# EAGLE board ProjetoU2 (EAGLE 9.7.0)

Size 239.29 x 81.54 mm. Coordinates in mm from the lower left corner, seen from the top.
Outline: 0,0 239.29,0 239.29,81.54 0,81.54 0,0
Copper layers (1*16): Top 0.035mm / dielectric 1.5mm / Bottom 0.035mm
Design rules "default": minimum track width 6mil, minimum drill 0.35mm, track to track 6mil, track to pad 6mil, pad to pad 6mil, via to via 6mil, smd to smd 6mil, copper to edge 40mil, drill to drill 6mil, minimum pad ring 10mil, minimum via ring 8mil, stop-mask expansion 4mil, vias tented up to drill 0mil, thermal gap 10mil

## Footprints (pad centres in the part's own frame; a part is rotated, then mirrored left to right if it is on the bottom)
LEDRD254W60D565H860B_W = drill 0.981 pad 1.581: 1 -1.27,0; 2 1.27,0
LEDRD254W60D565H860B = drill 0.981 pad 1.581: 1 -1.27,0; 2 1.27,0
LEDRD254W60D565H860B_Y = drill 0.981 pad 1.581: 1 -1.27,0; 2 1.27,0
LEDRD254W60D565H860B_O = drill 0.981 pad 1.581: 1 -1.27,0; 2 1.27,0
RESAD1016W63L850D250B = drill 0.83 pad 1.43: 1 -5.08,0; 2 5.08,0
HA-06-SM065 = drill 1 pad 1.676: 1 -2.54,-2.54; 2 0,2.54; 3 2.54,-2.54
SWITCH-MOMENTARY-PTH-6.5MM = drill 1.016 pad 1.88: 1 -3.251,2.261; 2 3.251,2.261; 3 -3.251,-2.261; 4 3.251,-2.261
SG90 = drill 1.016 long: 1 -2.54,0; 2 0,0; 3 2.54,0
ARDUINO-UNO-R3-SHIELD = drill 1.016 pad 1.88: 3.3V 24.13,-2.54; 5V 24.13,0; A0 24.13,12.7; A1 24.13,15.24; A2 24.13,17.78; A3 24.13,20.32; A4 24.13,22.86; A5 24.13,25.4; AREF -24.13,-13.97; D2 -24.13,20.32; D3 -24.13,17.78; D4 -24.13,15.24; D5 -24.13,12.7; D6 -24.13,10.16; D7 -24.13,7.62; D8 -24.13,3.81; D9 -24.13,1.27; D10 -24.13,-1.27; D11 -24.13,-3.81; D12 -24.13,-6.35; D13 -24.13,-8.89; GND@0 24.13,2.54; GND@1 24.13,5.08; GND@2 -24.13,-11.43; IOREF 24.13,-7.62; NC 24.13,-10.16; RES 24.13,-5.08; RX -24.13,25.4; SCL -24.13,-19.05; SDA -24.13,-16.51; TX -24.13,22.86; VIN 24.13,7.62

## Placement (x,y rotation side)
DFARÓIS  WHITE  [LEDRD254W60D565H860B_W]  206.29,39.07 180 top
DIE  RED  [LEDRD254W60D565H860B]  216.45,39.07 180 top
DPD  YELLOW  [LEDRD254W60D565H860B_Y]  231.69,39.07 180 top
DPE  ORANGE  [LEDRD254W60D565H860B_O]  224.07,39.07 180 top
R1  10k  [RESAD1016W63L850D250B]  93.26,13.67 90 top
R2  10k  [RESAD1016W63L850D250B]  103.42,13.67 90 top
R3  10k  [RESAD1016W63L850D250B]  113.58,13.67 90 top
R4  10k  [RESAD1016W63L850D250B]  123.74,13.67 90 top
R5  220  [RESAD1016W63L850D250B]  207.56,28.91 90 top
R6  220  [RESAD1016W63L850D250B]  217.72,28.91 90 top
R7  220  [RESAD1016W63L850D250B]  225.34,28.91 90 top
R8  220  [RESAD1016W63L850D250B]  232.96,28.91 90 top
R9  10k  [RESAD1016W63L850D250B]  166.92,44.15 0 top
R10  10k  [RESAD1016W63L850D250B]  177.08,41.61 0 top
R11  10k  [RESAD1016W63L850D250B]  187.24,39.07 0 top
RPOT2  400k  [HA-06-SM065]  154.22,26.37 0 top
RPOT3  250k  [HA-06-SM065]  141.52,26.37 0 top
S1  SWITCH_MOMENTARY  [SWITCH-MOMENTARY-PTH-6.5MM]  95.8,30.18 90 top
S2  SWITCH_MOMENTARY  [SWITCH-MOMENTARY-PTH-6.5MM]  105.96,30.18 90 top
S3  SWITCH_MOMENTARY  [SWITCH-MOMENTARY-PTH-6.5MM]  116.12,30.18 90 top
S4  SWITCH_MOMENTARY  [SWITCH-MOMENTARY-PTH-6.5MM]  126.28,30.18 90 top
SERVO1  SERVOSG90  [SG90]  192.47,74.56 180 top
U1  ARDUINO-UNO-R3-SHIELD  [ARDUINO-UNO-R3-SHIELD]  47.88,29.84 270 top

## Library data of the parts
DFARÓIS = Tinkercad; CATEGORY: Opto-Electronic; SUB-CATEGORY: LED; VALUE: LED_WHITE
DIE = Tinkercad; CATEGORY: Opto-Electronic; SUB-CATEGORY: LED; VALUE: LED_RED
DPD = Tinkercad; CATEGORY: Opto-Electronic; SUB-CATEGORY: LED; VALUE: LED_YELLOW
DPE = Tinkercad; CATEGORY: Opto-Electronic; SUB-CATEGORY: LED; VALUE: LED_ORANGE
R1-R11 RPOT2 RPOT3 S1-S4 SERVO1 U1 = Tinkercad

## Nets
DFARÓIS_A: DFARÓIS.1 R5.2
DIE_A: DIE.1 R6.2
DPD_A: DPD.1 R8.2
DPE_A: DPE.1 R7.2
R10_2: R10.2 R11.1
U1_5V: R9.1 RPOT2.1 RPOT3.1 S1.3 S1.4 S2.3 S2.4 S3.3 S3.4 S4.3 S4.4 SERVO1.2 U1.5V
U1_A0: R9.2 R10.1 U1.A0
U1_A1: RPOT2.2 U1.A1
U1_A2: RPOT3.2 U1.A2
U1_D4: R8.1 U1.D4
U1_D5: R7.1 U1.D5
U1_D6: R6.1 U1.D6
U1_D7: R5.1 U1.D7
U1_D9: SERVO1.3 U1.D9
U1_D10: R1.2 S1.1 S1.2 U1.D10
U1_D11: R2.2 S2.1 S2.2 U1.D11
U1_D12: R3.2 S3.1 S3.2 U1.D12
U1_D13: R4.2 S4.1 S4.2 U1.D13
U1_GND: DFARÓIS.2 DIE.2 DPD.2 DPE.2 R1.1 R2.1 R3.1 R4.1 R11.2 RPOT2.3 RPOT3.3 SERVO1.1 U1.GND@0 U1.GND@1 U1.GND@2

## Tracks (layer width: path | path; a pad name or v marks a point on that pad's centre or on a via)
DFARÓIS_A  (1 unrouted)
DIE_A  (1 unrouted)
DPD_A  (1 unrouted)
DPE_A  (1 unrouted)
R10_2  (1 unrouted)
U1_5V  (12 unrouted)
U1_A0  (2 unrouted)
U1_A1  (1 unrouted)
U1_A2  (1 unrouted)
U1_D4  (1 unrouted)
U1_D5  (1 unrouted)
U1_D6  (1 unrouted)
U1_D7  (1 unrouted)
U1_D9  (1 unrouted)
U1_D10  (3 unrouted)
U1_D11  (3 unrouted)
U1_D12  (3 unrouted)
U1_D13  (3 unrouted)
U1_GND  (14 unrouted)